# Altium PCB WS7.820.291.V04.PcbDoc (part 2 of 3)
Units mil, origin at the board's own origin, x right, y up, seen from the top; angles counter-clockwise.
Board outline 9222.63 x 1665.56 mil, 4 copper layers (Top Layer, S2, S3, Bottom Layer); 240 components, 148 nets, 713 pads, 1711 vias.
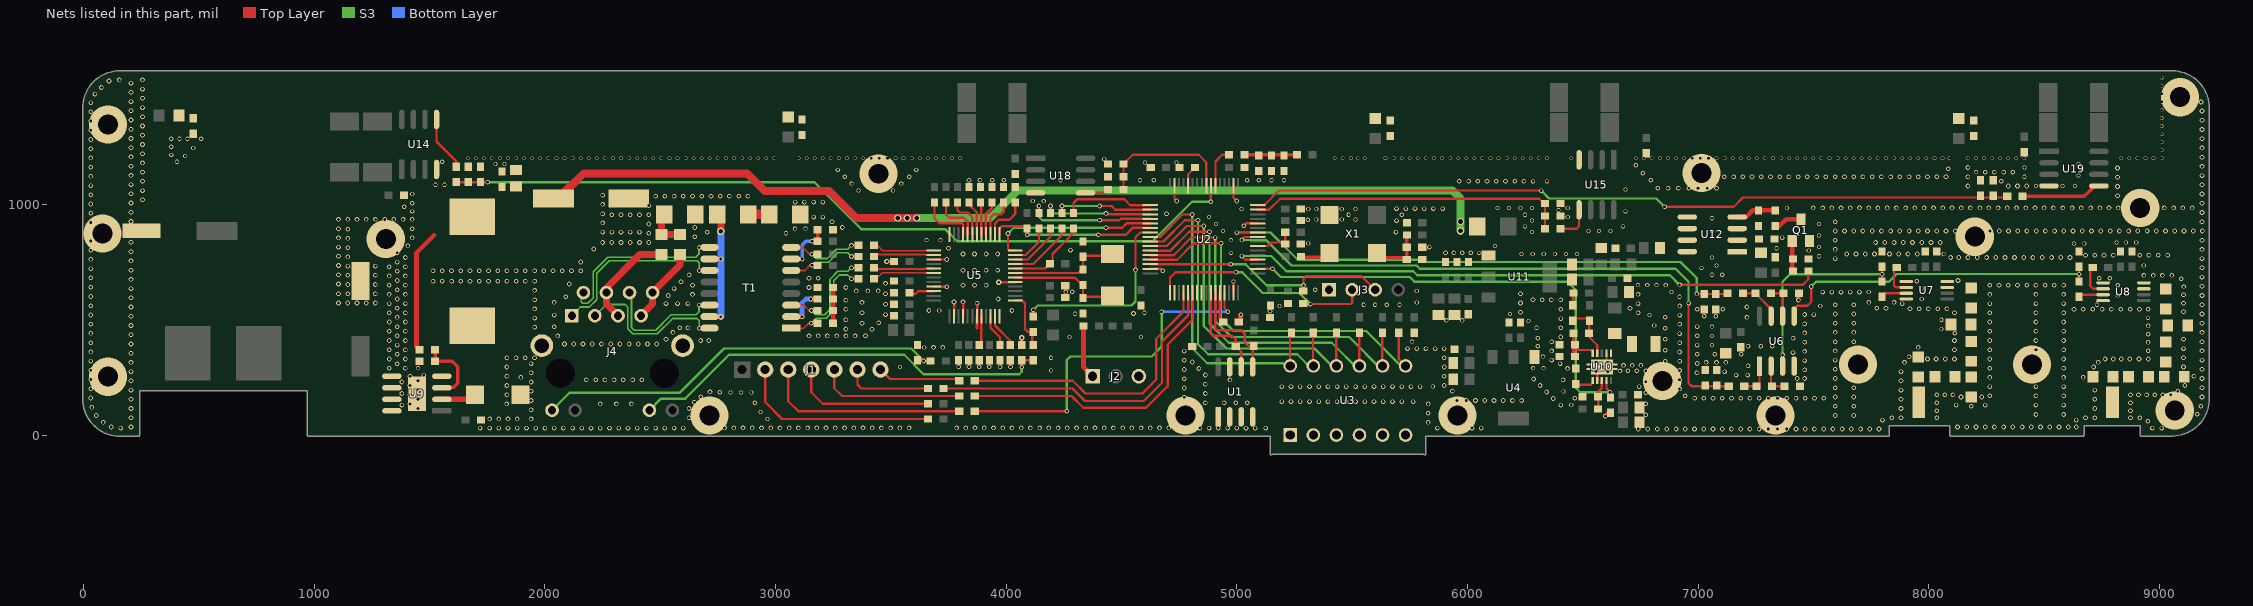
[diagram p4: the nets of this part, all layers, seen from the top]

## Via types
v1: diameter 20, hole 12, Top Layer to Bottom Layer, tented both sides, 1181 vias
v2: diameter 18, hole 12, Top Layer to Bottom Layer, tented both sides, 177 vias
v3: diameter 26, hole 16, Top Layer to Bottom Layer, tented both sides, 160 vias
v4: diameter 15.75, hole 12, Top Layer to Bottom Layer, tented both sides, 151 vias
v5: diameter 165.35, hole 86.61, Top Layer to Bottom Layer, 17 vias
v6: diameter 32, hole 20, Top Layer to Bottom Layer, tented both sides, 14 vias
v7: diameter 23.62, hole 11.81, Top Layer to Bottom Layer, tented both sides, 8 vias
v8: diameter 30, hole 20, Top Layer to Bottom Layer, tented both sides, 1 vias
v9: diameter 20, hole 11.81, Top Layer to Bottom Layer, tented both sides, 1 vias
v10: diameter 20, hole 12, Top Layer to Bottom Layer, 1 vias

## Nets (pads, with @x,y where several pads share a name; then routed paths per layer and width w, separated by ;. In a path a pad name is that pad's centre, name@x,y a point inside that pad or via, vN(x,y) a via of type N, cw(c..) or ccw(c..) an arc to the next point about the centre after c; other vN are vias at no path point) (continued)
GND: C1.1 C2.1 C3.1 C4.1 C5.1 C6.1 C7.1 C8.1 C9.1 C10.1 C11.2 C12.2 C13.1 C14.1 C15.1 C16.1 C17.1 C18.1 C19.1 C20.1 C21.1 C22.2 C23.2 C24.1 C25.1 C26.1 C27.1 C28.1 C29.1 C30.1 C31.1 C32.1 C33.1 C34.1 C35.1 C36.1 C37.1 C38.1 C39.1 C40.1 C41.1 C42.1 C43.2 C44.2 C45.2 C46.2 C47.2 C51.2 C52.1 C53.1 C54.1 C55.2 C56.2 C60.1 C61.1 C62.1 C63.1 C64.2 C65.1 C66.1 C67.1 C68.1 C72.2 C73.1 C74.2 C75.2 C76.1 C77.1 C78.1 C79.1 C80.1 C81.1 C82.1 C84.2 C85.2 C87.2 C88.1 C89.1 C90.1 C91.1 C92.1 C93.1 C94.1 C95.1 C96.1 C97.1 C98.1 C99.1 C100.1 C101.1 C103.1 C104.1 C105.1 C106.1 D1.1 J2.3 J3.1 J4.13 J4.14 L11.1 Q1.2 R4.2 R8.1 R10.1 R15.1 R52.1 R55.1 R56.1 R57.1 R58.1 R59.1 R60.1 R64.1 R65.1 R66.1 R67.1 R72.1 R73.1 R74.1 R75.1 R82.2 R86.1 R123.1 U1.1 U1.2 U1.3 U1.4 U1.7 U2.12 U2.18 U2.31 U2.47 U2.63 U3.1 U3.3 U3.5 U3.7 U3.9 U3.11 U4.1 U5.3 U5.9 U5.14 U5.16 U5.19 U5.29 U5.48 U6.4 U7.4 U7.5 U7.8 U8.4 U8.5 U8.8 U9.4 U9.5 U9.6 U9.7 U9.8 U9.9 U10.2 U10.7 U10.11 U11.1 U14.4 U15.4 U18.4 U19.4 X1.2 | length 1018.8
  Top Layer w10: v7(3482.85,752.46) C31.1@3513.39,752.46 ; U5.9@3685.69,643.25 v1(3742.18,643.25) ; U5.3@3685.69,761.36 v1(3742,761.36) ; v9(3774,577) 3774.27,576.73 U5.14@3774.27,515.3 ; v1(3812.85,577.46) 3813.64,576.68 U5.16@3813.64,515.3 ; U5.19@3872.69,515.3 3872.69,462.31 3874,463.61 v1(3874,571.79) ; v7(3967.85,662.46) 3968.32,662.94 U5.29@4040.02,662.94 ; C39.1@4067.85,390.93 v7(4067.85,422.46) ; U2.47@4625.55,721.04 4670.32,721.04 v2(4678.7,712.66) ; U2.31@4730.08,1081.2 4730.08,1024.92 v1(4740,1015) ; U2.63@4985.71,616.52 4985.71,662.71 v2@4986,663 ; v2@4986,662 v2(4986,666) ; U2.18@4985.98,1081.2 4985.98,1029.02 v1(5000,1015) ; v1(5030,908) 5039.89,917.89 U2.12@5090.23,917.89 ; U10.2@6563.31,236.94 U10.11@6563.31,272.57 ; v10(6598.35,81.39) R4.2@6604.86,81.39 ; U10.11@6602.68,319.43 U10.7@6602.68,355.06 ; v1(7435,585.37) v1@7435.31,587.69
  Top Layer w20: R10.1@5008.46,490 5016,497.54 5016,511.65 5017,512.65 v1(5017,521.65) ; v10(6598.35,81.39) 6613.49,96.54 R4.2@6620,96.54 ; v1@7435.31,587.69 R75.1@7435.31,614.81
  other v1: 6740.29,26 6781.76,26 6823.23,26 6864.7,26 6904.7,26 6944.7,26 6984.7,26 7024.7,26 7064.7,26 7104.7,26 7144.7,26 7184.7,26 7224.7,26 7264.7,26 7304.7,26 7344.7,26 7384.7,26 7424.7,26 7464.7,26 7504.7,26 7544.7,26 7584.7,26 7624.7,26 7664.7,26 7704.7,26 7744.7,26 7784.7,26 160,30 1719,30 1760,30 1800,30 1840,30 1880,30 1920,30 1960,30 2000,30 2040,30 2080,30 2120,30 2160,30 2200,30 2240,30 2280,30 2320,30 2360,30 2400,30 2440,30 2480,30 2520,30 2560,30 2600,30 4840,30 4880,30 4920,30 4960,30 5000,30 5040,30 5080,30 5125,30 5870,30 6020,30 6060,30 8970,30 9010,30 2779,31 2819,31 2859,31 2899,31 2939,31 2979,31 3019,31 3059,31 3099,31 3139,31 3179,31 3219,31 3259,31 3299,31 3339,31 3379,31 3419,31 3459,31 3499,31 3539,31 3579,31 3785,31 3825,31 3865,31 3905,31 3945,31 3985,31 4025,31 4065,31 4105,31 4145,31 4185,31 4225,31 4265,31 4305,31 4345,31 4385,31 4425,31 4465,31 4505,31 4545,31 4585,31 4625,31 4665,31 4705,31 120,35 205,35 8125,35 8165,35 8205,35 8245,35 8285,35 8325,35 8365,35 8405,35 8445,35 8485,35 8525,35 8565,35 8605,35 8640,35 85,55 5830,55 8950,60 7800,65 8640,65 1760,70 1800,70 1840,70 1880,70 1940,70 205,75 2625,75 7840,75 7880,75 8035,75 8680,75 8720,75 8875,75 8915,75 55,85 7595,85 7675,85 6773,87.91 8465,89 8585,89 9165,90 5830,95 8035,105 8875,105 1940,110 205,115 1450,115 2625,115 7880,115 8720,115 35,120 7595,125 7675,125 8185,125 9180,125 1380,130 6405,130 8120,130 8245,130 8465,130 8585,130 1415,135 1833.92,135 2240,135 2310,135 2375,135 5830,135 6773,135.52 4863.85,140.15 4945,140 4995,140 5045,140 8035,140 8875,140 2648,142 5195,145 5235,145 5275,145 5315,145 5355,145 5395,145 5435,145 5475,145 5515,145 5555,145 5595,145 5635,145 5675,145 5715,145 5765,145 1940,150 5955,150 5995,150 6035,150 6075,150 6115,150 6155,150 6195,150 6235,150 205,155 1450,155 7880,155 8720,155 6371.72,158.28 6465,160 6985,160 7025,160 7065,160 7105,160 7145,160 7185,160 7225,160 7265,160 7305,160 7345,160 7385,160 7425,160 7465,160 7505,160 7545,160 30.58,160.66 4772,164 7595,165 7675,165 8140,165 8230,165 9185,165 2675.59,166.01 6945,170 8265,170 8465,170 8585,170 1415,175 1835,175 8035,175 8070,175 8105,175 8875,175 8910,175 8945,175 8980,175 9015,175 9050,175 1380,180 4863.85,180.15 6773,183.14 2758,186 2716,187 6343.43,186.57 1940,190 5935,190 9080,190 205,195 1450,195 7880,195 8720,195 6920,200 30.58,200.66 4772,204 7595,205 7675,205 9185,205 5195,210 5235,210 5275,210 5315,210 5355,210 5395,210 5435,210 5475,210 5515,210 5555,210 5595,210 5635,210 5675,210 5715,210 5755,210 5795,210 6745,210 8265,210 8465,210 8585,210 1415,215 1835,215 5900,215 6315.15,214.85 9110,215 4863.85,220.15 1380,230 1940,230 6773,230.76 205,235 1450,235 7880,235 4970,239 2180,240 2220,240 2260,240 2300,240 2340,240 2380,240 2420,240 6415,240 6920,240 30.58,240.66 6286.86,243.14 4772,244 7430,245 7461.85,245 7595,245 9185,245 1895,250 8265,250 8585,250 8670,250 1415,255 1835,255 5900,255 9150,255 1475,260 4863.85,260.15 7165,260 7215,260 1940,270 6995,270 205,275 7115,275 7880,275 6558,276 6608,276 6662,278 6695,279 6734,279 6773,279 6920,280 30.58,280.66 7461.85,282.75 4772,284 7595,285 9185,285 4835.57,288.43 6434,289 1325,290 1395,290 8265,290 8585,290 1835,295 5900,295 8715,295 9105,295 3793.69,295.93 3838.69,295.93 3883.69,295.93 3927,295.93 3973.69,295.93 4018.69,295.93 6583,296 7217,300.18 6677,302 6714.5,302 6752,302 1359.66,309.66 1940,310 6402,310 6997,310.18 205,315 7035,315 7080,315 7120,315 7895,315 8735,315 6558,316 6608,316 4807.28,316.72 6858,320.29 6920,320 30.58,320.66 7461.85,322.75 4772,324 6365,325 7595,325 9185,325 1325,330 1395,330 7995,330 8032,330 8072,330 8112,330 8265,330 8585,330 8765,330 8800,330 8835,330 8872,330 8912,330 8952,330 1835,335 1875,335 1915,335 1955,335 5900,335 9105,335 7915,340 1360.1,350.1 6997,350.18 7072,350.18 7187,350.18 205,355 7411.56,357.46 6920,360 30.58,360.66 7461.85,362.75 4772,364 6365,365 7595,365 9185,365 8952,365.83 6858,367.91 1325,370 1395,370 8112,370 8265,370 8465,370 8585,370 5740,375 5780,375 5820,375 5860,375 5900,375 9105,375 3685,380 3725,380 7955,380 7217,385.18 7272,385.18 7322,385.18 1360.1,390.1 6997,390.18 205,395 2085,395 2125,395 2165,395 2205,395 2245,395 2285,395 2325,395 2365,395 2405,395 2445,395 2485,395 6920,400 30.58,400.66 8952,401.67 7461.85,402.75 6365,405 7595,405 7675,405 9185,405 1325,410 1395,410 2675,410 2710,410 8112,410 8265,410 8465,410 8585,410 2525,415 9105,415 6858,415.52 7412,420.18 6405,425 1360.1,430.1 2055,430 3145,430 3185,430 3225,430 3265,430 3305,430 3345,430 3390.15,430.15 6997,430.18 205,435 8952,437.5 6920,440 30.58,440.66 8113,441 7461.85,442.75 2555,445 7595,445 7675,445 9185,445 1325,450 1395,450 8265,450 8465,450 8585,450 3418.43,458.43 3305,460 6858,463.14 2585,465 2620,465 6405,465 1955.21,467.13 1360.1,470.1 2040,470 6997,470.18 8952,473.33 205,475 6920,480 30.58,480.66 7461.85,482.75 3375,485 7595,485 7675,485 9185,485 3446.72,486.72 1325,490 1395,490 8265,490 8465,490 8585,490 5909,497 5977.35,497 3305,500 6405,505 1955.21,507.13 1360.1,510.1 7212,510.18 6858,510.76 205,515 7027,515.18 7077,515.18 2040,520 6920,520 30.58,520.66 7502,522.23 3476.85,522.46 7461.85,522.75 7595,525 7675,525 9185,525 4552,527 1325,530 1395,530 3375,530 6740,530 8112,530 8265,530 8465,530 8585,530 6230,532.49 9105,535 5144,537 3665,540 4025,540 3305,545 6405,545 6997,545.18 7107,545.18 8630,545 8670.62,545 8711.25,545 8751.88,545 8792.5,545 8833.12,545 8873.75,545 8914.38,545 8952,545 1955.21,547.13 7919,548 7959,548 7999,548 8039,548 8079,548 1360.1,550.1 6705,550 7775,550 7815,550 205,555 7212,555.18 6920,560 30.58,560.66 7595,565 7675,565 9185,565 3476.85,567.46 1325,570 1395,570 2525,570 2575,570 2620,570 6740,570 7885,570 8265,570 8465,570 8585,570 9105,571.5 1105,572.59 1145,572.59 1185,572.59 1225,572.59 1265,572.59 6230,572.49 2040,575 3375,575 7740,575 7850,575 3305,585 1955.21,587.13 6284.14,587 6324.14,587 6364.14,587 6404.14,587 1360.1,590.1 3965,590 205,595 2090,600 30.58,600.66 2535,605 9185,605 9105,608 1325,610 1395,610 2640,610 6740,610 8265,610 8465,610 8585,610 1105,612.59 1145,612.59 1265,612.59 3476.85,612.46 6230,612.49 7540,620 7580,620 7620,620 7660,620 7700,620 4257.85,620.81 4287,621 3350,625 3400,625 3445,625 1955.21,627.13 1360.1,630.1 205,635 2560,635 3145,640 3305,640 30.58,640.66 9185,645 1325,650 1395,650 2640,650 3812.85,649.93 3862.85,649.93 3912.85,649.93 8265,650 8305,650 8345,650 8385,650 8425,650 8465,650 8505,650 8545,650 8585,650 8820,650 1145,652.59 1265,652.59 1105,655 2105,655 3476.85,657.46 2590,665 1515.21,667.13 1555.21,667.13 1595.21,667.13 1635.21,667.13 1675.21,667.13 1715.21,667.13 1755.21,667.13 1795.21,667.13 1835.21,667.13 1875.21,667.13 1915.21,667.13 1955.21,667.13 7948,667 1360.1,670.1 8127,670 205,675 3145,680 8740,680 8785,680 30.58,681.66 9185,685 1325,690 1395,690 8933.42,692.13 8973.42,692.13 9013.42,692.13 9054.42,692.13 1145,692.59 1265,692.59 1105,695 2625,695 1360.1,710.1 1515.15,712.24 1555.15,712.24 1595.15,712.24 1635.15,712.24 1675.15,712.24 1715.15,712.24 1755.15,712.24 1795.15,712.24 1835.15,712.24 1875.15,712.24 1915.15,712.24 1955.15,712.24 1995.15,712.24 2035.15,712.24 2075.15,712.24 2115.15,712.24 2155.15,712.24 205,715 3812.85,714.93 3862.85,714.93 3912.85,714.93 3962.85,714.93 30.58,721.66 9185,725 1325,730 1395,730 1145,732.59 1265,732.59 1105,735 1360.1,750.1 2155.15,750.15 205,755 30.58,761.66 7595,765 9185,765 1395,770 8095,770 8130,770 8170,770 8211,770 8251,770 8291,770 8331,770 8372,770 8412,770 8452,770 8492,770 8533,770 8573,770 8613,770 1145,772.59 1105,775 8680,780 8720,780 8760,780 8801,780 8915,780 8955,780 8995,780 9036,780 3812.85,784.93 3862.85,784.93 3912.85,784.93 3962.85,784.93 7645,785 7685,785 7725,785 7765,785 7830,785 7870,785 7910,785 7950,785 1360.1,790.1 5905,790 5941.5,790 5978,790 6014.5,790 205,795 30.58,801.66 4279,802 7595,805 9185,805 2211.72,806.72 3750,810 1145,812.59 1105,815 5835,815 1405,820 2250,835 2290,835 2330,835 2370,835 2410,835 2450,835 7770,835 7810,835 7850,835 7890,835 7930,835 7970,835 8010,835 8050,835 205,836 30.58,841.66 7595,845 9185,845 1145,852.59 1105,855 1425,855 7365,856.18 2650,860 2450,875 2704,879 2250,880 2290,880 2330,880 2370,880 2410,880 5690,880 7595,885 7635,885 7675,885 7715,885 7755,885 7795,885 7835,885 7875,885 7915,885 7955,885 7995,885 8035,885 8075,885 8115,885 8266,885 8306,885 8346,885 8386,885 8426,885 8466,885 8506,885 8546,885 8586,885 8626,885 8666,885 8706,885 8746,885 8787,885 8827,885 8867,885 8907,885 8947,885 8987,885 9027,885 9067,885 9107,885 9147,885 9187,885 1145,892.59 1105,895 1425,895 2650,900 3290,900 2450,915 2250,920 30.58,921.66 3245,925 7595,925 9185,925 205,926 5692.49,930 5308,934 1105,935 1145,935 1185,935 1225,935 1265,935 1305,935 1345,935 1385,935 1425,935 3165,945 3205,945 2290,955 2330,955 2370,955 2410,955 2450,955 5715,955 2250,960 4695,960 30.58,961.66 9185,965 205,966 5692.49,982.06 5732.49,982.06 5772.49,982.06 5812.49,982.06 5852.49,982.06 5892.49,982.06 7500,985 7540,985 7580,985 7620,985 7660,985 7700,985 7740,985 7780,985 7820,985 7860,985 7900,985 7940,985 7980,985 8021,985 8061,985 8101,985 8141,985 8181,985 8221,985 8261,985 8301,985 8341,985 8381,985 8421,985 8461,985 8501,985 8541,985 8582,985 8622,985 8662,985 8702,985 8742,985 8782,985 8822,985 9022,985 9062,985 9102,985 9143,985 2450,995 2250,1000 30.58,1001.66 9185,1005 205,1006 3085,1010 3125,1010 3165,1010 3205,1010 255,1020 2480,1035 2520,1035 2560,1035 2600,1035 2640,1035 2680,1035 2720,1035 2760,1035 2800,1035 2840,1035 2880,1035 8818.94,1037.83 2250,1040 30.58,1041.66 9185,1045 205,1046 255,1060 6825,1070 6870,1070 6915,1070 6960,1070 7000,1070 7040,1070 7080,1070 8818.94,1077.83 8170,1080 8345,1080 8385,1080 8425,1080 30.58,1081.66 9185,1085 205,1086 255,1100 5965,1100 6005,1100 6045,1100 6085,1100 6125,1100 6165,1100 6205,1100 6245,1100 8315,1100 3839,1105 3886,1105 3940,1105 3990,1105 6795,1105 8818.94,1117.83 7114,1120 7154,1120 7194,1120 7234,1120 7274,1120 7314,1120 7354,1120 7394,1120 7434,1120 7474,1120 7514,1120 7554,1120 7595,1120 7635,1120 7675,1120 7715,1120 7755,1120 7795,1120 7835,1120 7875,1120 7915,1120 7955,1120 7995,1120 8035,1120 8075,1120 8170,1120 30.58,1121.66 9185,1125 205,1126 6760,1135 255,1140 8245,1140 8285,1140 8325,1140 8365,1140 8818.94,1157.83 8170,1160 30.58,1161.66 9185,1165 205,1166 255,1180 4425,1196.65 30.58,1201.66 9185,1205 205,1206 255,1220 30.58,1241.66 9185,1245 205,1246 255,1260 30.58,1281.66 9185,1285 205,1286 255,1300 30.58,1321.66 9185,1325 205,1326 255,1340 30.58,1361.66 9185,1365 205,1366 255,1380 30.58,1401.66 9185,1405 205,1406 255,1420 30.58,1441.66 9181,1444 205,1446 255,1460 48.54,1478.54 205,1486 255,1500 76.82,1506.82 205,1526 110,1535 155,1540 255,1540
  other v2: 2965,70 2935,100 6450,130 2910,140 2805,185 2850,185 2895,185 6416,189 5850,210 4195,280 1450,290 6285,290 6330,290 3540,295 4195,335 6327.91,339.86 3645,380 6305,385 7060,390 5760,405 6305,420 4275,425 4585,425 7060,430 8055,460 6300,465 7060,470 6810,475 6265,495 8055,500 8951,508.17 6790,520 6185,525 4299,526 4600,530 3710,540 5185,560 7530,560 5550,565 5600,565 5650,565 5705,565 8730,565 5780,575 7970,590 6920,600 8820,605 6885,620 7740,620 5780,625 5340,630 7970,635 9106,643.5 6740,650 6780,650 6820,650 6860,650 9095,678 3185,680 7060,695 7105,695 7015,725 7080,735 8932.42,735 7060,770 7525,775 6235,785 6283,785 6331,785 6379,785 6427,785 6475,785 8065,785 4975,790 6050,790 7480,800 7340,810 7525,815 6120,820 5310,830 8630,830 8675,830 8815,835 8855,835 8900,835 3655,845 3715,845 4975,845 7525,865 3045,875 6280,880 4940,885 6525,885 6570,885 6620,885 7060,885 3085,895 3130,895 6250,905 6675,905 4910,915 7525,915 6280,930 5345,935 5455,935 5515,935 7060,940 4880,945 6435,945 5485,955 6250,955 1425,970 6685,970 6395,975 5020,980 5310,980 5345,980 5455,980 5515,980 6130,985 6180,985 6230,985 6280,985 6435,985 7385,985 1390,990 1425,1005 4163.17,1014.17 4115,1015 1425,1045 3360,1060 3510,1060 6685,1065 8465,1080 8580,1080 8635,1080 1525,1085 1565,1085 3330,1090 3545,1090 6285,1100 6345,1100 4235,1105 4580,1105 4640,1105 5045,1105 5095,1105 5150,1105 5205,1105 3300,1120 3580,1120 8415,1120 8650,1125 8205,1140 3270,1150 3610,1150 8085,1155 8415,1160 6730,1170 1785,1175 1825,1175 8650,1175 4602,1181.65 4739.04,1181.65 405,1185 1555,1185 440,1210 380,1215 475,1245 380,1250 380,1285 415,1285 450,1285 510,1285
  other v4: 1665,1200 1700,1200 1735,1200 1770,1200 1805,1200 1840,1200 1875,1200 1910,1200 1945,1200 1980,1200 2015,1200 2050,1200 2085,1200 2120,1200 2155,1200 2190,1200 2225,1200 2260,1200 2295,1200 2330,1200 2365,1200 2400,1200 2435,1200 2470,1200 2505,1200 2540,1200 2575,1200 2610,1200 2645,1200 2680,1200 2715,1200 2750,1200 2785,1200 2820,1200 2855,1200 2890,1200 2925,1200 2960,1200 2995,1200 3100,1200 3135,1200 3170,1200 3205,1200 3240,1200 3275,1200 3310,1200 3345,1200 3380,1200 3415,1200 3450,1200 3485,1200 3520,1200 3555,1200 3590,1200 3625,1200 3660,1200 3695,1200 3730,1200 3765,1200 3800,1200 5425,1200 5460,1200 5495,1200 5525,1200 5555,1200 5645,1200 5680,1200 5715,1200 5750,1200 5785,1200 5820,1200 5855,1200 5890,1200 5925,1200 5960,1200 5995,1200 6030,1200 6065,1200 6100,1200 6135,1200 6170,1200 6205,1200 6240,1200 6275,1200 6310,1200 6345,1200 6450,1200 6730,1200 6765,1200 6800,1200 6835,1200 6870,1200 6905,1200 6940,1200 6975,1200 7010,1200 7045,1200 7080,1200 7115,1200 7150,1200 7185,1200 7220,1200 7255,1200 7290,1200 7325,1200 7360,1200 7395,1200 7430,1200 7465,1200 7500,1200 7535,1200 7570,1200 7605,1200 7640,1200 7675,1200 7710,1200 7745,1200 7780,1200 7815,1200 7850,1200 7885,1200 7920,1200 7955,1200 7990,1200 8025,1200 8060,1200 8090,1200 8170,1200 8205,1200 8240,1200 8275,1200 8310,1200 8345,1200 8380,1200 8413.87,1200 8835,1200 8870,1200 8905,1200 8940,1200 8975,1200 9010,1200 9010,1235 9010,1270 9010,1305 9010,1340 9010,1375 9010,1410 9010,1445 9010,1480 9010,1515 9010,1550
  other v5: 4777,84 5957,84 2714,85 7336,85 9067,105.94 6845,235 105,253 7694,306 8448,306 1310,850 8200,860 81,874 8917.17,984.41 3447,1133 7015,1136.94 105,1346 9090.01,1465.01
I_SENSOR1: C92.2 C93.2 R93.2 U2.23 | length 3519.3
  Top Layer w10: R93.2@1615,1096.54 C92.2@1720.65,1096.54 v1(1751.54,1096.54) ; v1(4887.56,1012) U2.23@4887.56,1081.2
  S3 w10: v1(1751.54,1096.54) 3060,1096.54 3168.46,1096.54 3372,893 3735,893 3788,840 4634,840 4806,1012 v1(4887.56,1012)
I_SENSOR2: C103.2 C104.2 R100.2 U2.24 | length 600.5
  Top Layer w10: R100.2@4508.46,1065 C104.2@4508.46,1175 4548.46,1215 4835,1215 4867.87,1182.13 U2.24@4867.87,1081.2
I_SENSOR3: C94.2 C95.2 R94.2 U2.15 | length 1385.2
  Top Layer w10: U2.15@5090.23,976.95 5139.95,976.95 5188,1025 6311.54,1025 C95.2@6336.54,1000 ; R94.2@6336.54,895 C95.2@6336.54,1000 ; C95.2@6336.54,1003.65 C95.2@6336.54,1000
I_SENSOR4: C105.2 C106.2 R101.2 U2.16 | length 3324.2
  Top Layer w10: U2.16@5090.23,996.63 5118.63,996.63 5182,1060 v1(6320,1060) ; v1(6855,990) 7155,990 7195,1030 8335.54,1030 R101.2@8340.54,1035
  S3 w10: v1(6320,1060) 6354,1026 6819,1026 v1(6855,990)
IO1: R132.1 U2.45 U3.12 | length 1730.8
  Top Layer w10: U2.45@4625.55,760.41 4742.04,760.41 4812.85,831.23 v1(4931.85,831.23) ; R132.1@5701.85,443.76 5701.85,329.97 U3.12@5731.85,299.97 U3.12@5731.85,280.28
  S3 w10: v1(4931.85,831.23) 4931.85,505.15 4986,451 5561.13,451 U3.12@5731.85,280.28
IO2: R127.1 U2.44 U3.10 | length 1639.5
  Top Layer w10: U2.44@4625.55,780.1 4726.72,780.1 4802.85,856.23 v1(4906.85,856.23) ; U3.10@5630.7,281.99 R127.1@5630.7,433.53
  S3 w10: v1(4906.85,856.23) 4906.85,495.12 4976.97,425 5487.13,425 U3.10@5631.85,280.28
IO3: R119.1 U2.43 U3.8 | length 1573.7
  Top Layer w10: U2.43@4625.55,799.78 4712.41,799.78 4793.85,881.23 v1(4881.85,881.23) ; U3.8@5530.7,281.99 R119.1@5530.7,433.53
  S3 w10: v1(4881.85,881.23) 4881.85,483.15 4965,400 5412.13,400 U3.8@5531.85,280.28
IO4: R131.1 U2.42 U3.6 | length 1506.7
  Top Layer w10: U2.42@4625.55,819.47 4696.09,819.47 4782.85,906.23 v1(4856.85,906.23) ; U3.6@5430.7,281.99 R131.1@5430.7,433.53
  S3 w10: v1(4856.85,906.23) 4856.85,473.15 4955,375 5337.13,375 U3.6@5431.85,280.28
IO5: R126.1 U2.41 U3.4 | length 1480.2
  Top Layer w10: U2.41@4625.55,839.15 4681.78,839.15 4773.85,931.23 v1(4831.85,931.23) ; U3.4@5330.7,281.99 R126.1@5330.7,433.53
  S3 w10: v1(4831.85,931.23) 4831.85,394.15 4876,350 5262.13,350 U3.4@5331.85,280.28
IO6: R118.1 U2.40 U3.2 | length 1418
  Top Layer w10: U2.40@4625.55,858.84 4666.46,858.84 4763.85,956.23 v1(4806.85,956.23) ; U3.2@5230.7,281.99 R118.1@5230.7,433.53
  S3 w10: v1(4806.85,956.23) 4806.85,376.15 4872,311 5201.13,311 U3.2@5231.85,280.28
JTCK: J3.2 R8.2 U2.49 | length 1104.4
  Top Layer w10: U2.49@4710.12,616.52 4710.12,682.12 4734,706 v1(4997,706) ; R8.2@5288.46,570 5290.46,568 v1(5319,568) 5392,568 ; 5484,568 5392,568 ; J3.2@5500,630 5500,574 5494,568 5392,568
  S3 w10: v1(4997,706) 5023,706 5113,616 5271,616 v1(5319,568)
JTDI: U2.50
JTDO: U2.55
JTMS: J3.3 R6.1 U2.46 | length 1099.1
  Top Layer w10: U2.46@4625.55,740.73 v1(4974.27,740.73) ; R6.1@5288.46,625 5289,625.54 v1(5289,649) 5289,677 5301,689 5541,689 J3.3@5600,630
  S3 w10: v1(4974.27,740.73) 5038.27,740.73 5130,649 v1(5289,649) v1@5289,654
LINKLED: R50.2 R77.2 U5.25 | length 264.4
  Top Layer w10: U5.25@4040.02,584.2 4068.12,584.2 4081.35,570.96 4081.35,459.65 4094.46,446.54 R77.2@4117.85,446.54 ; R77.2@4112.85,444 4112.85,390.93 R50.2@4120.85,398.93
M_SCL: R2.1 U1.6 U2.58 | length 428.6
  Top Layer w10: U2.58@4887.28,616.52 4887.28,438.72 4896,430 4979,430 4995.31,413.69 R2.1@4995.31,383.65 ; R2.1@4997.28,383.65 4997.28,382.72 5019,361 U1.6@5019,290.27
M_SDA: R3.1 U1.5 U2.59 | length 467
  Top Layer w10: U2.59@4906.97,616.52 4906.97,462.03 4915,454 4991,454 5020,454 5034,440 5034,402 5049.46,386.54 R3.1@5070,386.54 ; R3.1@5067.42,384.12 R3.1@5069,382.54 ; U1.5@5069,290.27 R3.1@5069,382.54 ; R3.1@5070,381.54 R3.1@5069,382.54
NetC10_2: C10.2 C11.1 FB2.1 X1.4 | length 244.6
  Top Layer w15: X1.4@5607.36,789.32 5628.46,768.23 C10.2@5736.85,768.23 ; C10.2@5736.85,761.23 C11.1@5736.85,814.05 5736.85,866.87 FB2.1@5737.39,867.41
NetC33_2: C33.2 R33.1 R35.1 R37.1 | length 155.2
  Top Layer w20: C33.2@3248.46,640 3249.46,639 R35.1@3249.46,540.23 R37.1@3249.46,485.23
NetC35_2: C35.2 R47.2 U5.30 X2.2 | length 522.3
  Top Layer w10: U5.30@4040.02,682.62 4297.29,682.62 4332.85,647.06 4332.85,599.69 4470.77,599.69 4474,602.93 X2.2@4498.87,602.93
NetC36_2: C36.2 J4.9 R45.1 | length 1802
  Top Layer w10: C36.2@3615,324 3617.88,321.12 v1(3642,321.12) R45.1@3671.54,321.12
  S3 w10: J4.9@2030.83,107.65 2107.18,184 2586,184 2777,375 3588.12,375 v1(3642,321.12)
NetC37_2: C37.2 R47.1 U5.31 X2.1 | length 487.2
  Top Layer w10: U5.31@4040.02,702.31 4312.23,702.31 4332.85,722.93 4332.85,777.76 4453.6,777.76 X2.1@4460.85,785.01
NetC38_2: C38.2 U5.20 | length 128.3
  Top Layer w10: C38.2@3882.85,390.93 3892.38,400.46 U5.20@3892.38,515.3
NetC39_2: C39.2 J4.11 R50.1 | length 1848.1
  Top Layer w10: v1(4068,294) 4067.85,294.15 C39.2@4067.85,324 R50.1@4112.85,324
  S3 w10: J4.11@2452.87,107.65 2503.23,158 2608,158 2798,348 3558,348 3642,264 4057,264 4068,275 v1(4068,294)
NetC40_2: C40.2 U5.22 | length 141.4
  Top Layer w10: U5.22@3931.75,515.3 3931.75,465.57 3972.85,424.46 C40.2@3972.85,390.93
NetC41_2: C41.2 R46.1 R48.1 | length 173.2
  Top Layer w30: C41.2@2518.07,957 2506,944.93 R46.1@2506,868.78 R48.1@2586,868.78
NetC42_2: C42.2 R51.1 | length 91.1
  Top Layer w40: R51.1@2881.78,957 C42.2@2972.92,957
NetC48_1: C48.1 U7.6 | length 146.6
  Top Layer w10: C48.1@7861.54,726.65 7850,715.12 7850,648 7857.56,640.44 U7.6@7902.97,640.44 ; C48.1@7866.54,721.65 C48.1@7871.54,726.65
NetC49_1: C49.1 R63.2 R65.2
NetC49_2: C49.2 C50.1 R66.2
NetC50_2: C50.2 U7.3
NetC52_2: C52.2 R61.2 U6.3 | length 1008.6
  Top Layer w10: U6.3@7366.56,289.2 v1(7366.56,347.62) ; R61.2@7798,666.46 v1(7798,697) C52.2@7798,729.54
  S3 w10: v1(7366.56,347.62) 7366.56,665 7398.56,697 7545,697 ; 7420,697 7545,697 ; v1(7798,697) 7545,697
NetC57_1: C57.1 U8.6 | length 145.1
  Top Layer w10: C57.1@8711.54,726.65 8701,716.12 8701,700.46 8701,693 8701,646 8712.82,634.18 U8.6@8756.15,634.18
NetC58_1: C58.1 R71.2 R73.2
NetC58_2: C58.2 C59.1 R74.2
NetC59_2: C59.2 U8.3
NetC61_2: C61.2 R69.2 U6.5 | length 1514.8
  Top Layer w10: U6.5@7416.56,505.73 7416.56,546.56 7430,560 7472.82,560 7491,578.18 v1(7491,644.18) ; R69.2@8652,666.46 v1(8652,698) C61.2@8652,729.54
  S3 w10: 8034.39,698 8099,698 ; 8105,698 8099,698 ; v1(8652,698) 8099,698 ; v1@7492,645.18 7491,646.18 v1(7491,644.18) v1@7492,645.18 ; v1@7492,645.18 7511.82,665 7828,665 7861,698 8099,698
NetC68_2: C68.2 C72.1 C73.2 FB11.1 L4.2 R80.2 | length 4878.2
  Top Layer w20: R80.2@1456.54,370 1443,383.54 1443,790 1519,866
  Top Layer w35: 2104.23,1070.77 2168.46,1135 2876.54,1135 2952.54,1059 3232,1059 3350,941 v6(3612,941)
  Top Layer w40: C72.1@2031.61,1035 2068.46,1035 2104.23,1070.77
  S3 w35: v6(3530,941) v6(3612,941) 3931,941 4050,1060 5935,1060 5970,1025 v6(5970,885.89)
  other v6: 5970,925.89 3571,941
NetC75_1: C75.1 L5.2 R85.2 U12.1 U12.2 U12.3
NetC81_2: C81.2 C82.2 R83.2 R84.2 R86.2 | length 228.1
  Top Layer w15: R84.2@5033.46,1215 5150,1215 R83.2@5261.54,1215
NetC84_1: C84.1 C85.1 R22.2 U10.10 | length 194.8
  Top Layer w10: C84.1@6456.46,341 6459.54,344.07 R22.2@6459.54,441 ; 6459.54,369 6536,369 6543.63,361.37 U10.10@6543.63,355.06
NetC86_1: C86.1 R22.1 R25.2 U10.9 | length 224.8
  Top Layer w10: C86.1@6456.65,505.54 R25.2@6529.35,505.54 ; R25.2@6528,492.54 6528,425 6563.31,389.69 U10.9@6563.31,355.06
NetC86_2: C86.2 R27.2 | length 50.7
  Top Layer w10: C86.2@6456.65,572.46 R27.2@6456.65,623.12
NetC90_2: C90.2 R23.2 U10.3 | length 132.7
  Top Layer w10: R23.2@6571.46,113 6566.66,117.81 6566.66,187.65 6583,204 U10.3@6583,236.94
NetC97_2: C97.2 U10.1 | length 94.4
  Top Layer w10: C97.2@6466.46,226 6474.46,218 6535,218 6543.63,226.63 U10.1@6543.63,236.94
NetD1_2: D1.2 L4.1 U9.2 | length 135
  Top Layer w25: U9.2@1543.27,155 D1.2@1675.57,155 ; D1.2@1678.66,158.09 D1.2@1680.57,160
NetD2_2: D2.2 L11.2 U10.6
NetJ1_2: J1.2 R32.1 | length 877.5
  Top Layer w10: J1.2@2955,283.77 2955,143 3028,70 R32.1@3661.54,70
NetJ1_3: J1.3 R31.1 | length 896.5
  Top Layer w10: J1.3@3055,283.77 3055,147 3099,103 R31.1@3796.54,103
NetJ1_4: J1.4 R30.1 | length 625
  Top Layer w10: J1.4@3155,283.77 3155,186 3205,136 R30.1@3661.54,136
NetJ1_5: J1.5 R29.1 | length 636.4
  Top Layer w10: J1.5@3255,283.77 3255,203 3289,169 R29.1@3796.54,169
NetJ1_6: J1.6 R28.1 | length 378.3
  Top Layer w10: J1.6@3355,283.77 3355,219 3372,202 R28.1@3661.54,202
NetJ1_7: J1.7 R26.1 | length 361.7
  Top Layer w10: J1.7@3455,283.77 3495.77,243 3788.53,243 R26.1@3796.54,235
NetJ2_1: J2.1 L1.1 | length 234.3
  Top Layer w20: L1.1@4335.54,473 4335.54,294.46 J2.1@4375,255
NetJ4_4: J4.4 J4.5 R46.2 | length 440
  Top Layer w30: J4.5@2316.85,517.49 2266.85,567.49 J4.4@2266.85,617.49 2266.85,637.85 2411.16,782.16 R46.2@2506,782.16
NetJ4_7: J4.7 J4.8 R48.2 | length 334.7
  Top Layer w30: J4.7@2416.85,517.49 2466.85,567.49 J4.8@2466.85,617.49 2586,736.64 R48.2@2586,782.16
NetL3_1: L3.1 U12.5 U12.6 U12.7 U12.8
NetQ1_1: Q1.1 R88.2 R123.2 | length 131.7
  Top Layer w20: Q1.1@7408.57,841.42 7408.57,713.7 R88.2@7411.39,710.88
NetQ1_3: Q1.3 R87.1 | length 123.6
  Top Layer w20: R87.1@7334.4,906.99 7353.08,906.99 7382,935.91 Q1.3@7445.97,935.91
NetR9_1: R9.1 X1.3 | length 119.6
  Top Layer w15: R9.1@5290.25,771.83 5385.14,771.83 X1.3@5402.64,789.32
NetR10_2: R10.2 U2.60 | length 132.7
  Top Layer w10: U2.60@4926.65,616.52 4926.65,524.77 4926.65,504.88 R10.2@4941.54,490
NetR15_2: R15.2 U2.28 | length 90.9
  Top Layer w10: U2.28@4789.13,1081.2 4789.13,1130.67 R15.2@4818.46,1160
NetR16_1: R16.1 U2.36 | length 570.6
  Top Layer w10: R16.1@4142,962.46 v1(4142,993) ; v1(4405,931) 4491,931 4497.58,937.58 U2.36@4625.55,937.58
  S3 w10: v1(4142,993) 4142,945 4156,931 v1(4405,931)
NetR17_1: R17.1 U2.35 | length 490.8
  Top Layer w10: R17.1@4192,962.46 v1(4192,993) ; v1@4433,957.26 U2.35@4625.55,957.26
  S3 w10: v1(4192,993) 4192,970 4201,961 v1(4433,961)
NetR18_1: R18.1 U2.34 | length 425.7
  Top Layer w10: R18.1@4242,962.46 v1(4242,993) v1@4242,998 ; v1(4405,993) 4457,993 4473.05,976.95 U2.34@4625.55,976.95
  S3 w10: v1(4242,993) v1(4405,993)
NetR19_1: R19.1 U2.33 | length 395
  Top Layer w10: R19.1@4292,962.46 4292,1006 4309,1023 4512,1023 4538.37,996.63 U2.33@4625.55,996.63
NetR49_1: R49.1 U5.45 | length 247.9
  Top Layer w10: R49.1@3688.85,1009 3688.85,940.15 3710,919 3792,919 3807,919 3813.64,912.36 U5.45@3813.64,869.63
NetR51_2: R51.2 T1.10 T1.15 | length 548.3
  Top Layer w20: T1.15@2713.68,513.46 v7(2762.85,513.46) ; T1.10@2713.68,763.46 v7(2762.85,763.46)
  Top Layer w30: R51.2@2747.92,957 2762.85,942.07 v6(2762.85,883.85)
  Bottom Layer w30: v7(2762.85,513.46) v7(2762.85,763.46) v6(2762.85,883.85) v6@2763,884
NetR52_2: R52.2 U5.10 | length 93.5
  Top Layer w10: R52.2@3596.75,612.46 3607.46,612.46 3618.57,623.57 U5.10@3685.69,623.57
NetR53_1: R53.1 U5.44 | length 232.3
  Top Layer w10: R53.1@3738.85,992.15 R53.1@3738.85,1009 3738.85,956.15 3753,942 3816,942 3833.32,924.68 U5.44@3833.32,869.63
NetR54_1: R54.1 U5.43 | length 206.7
  Top Layer w10: 3788.85,988.15 R54.1@3788.85,1009 3788.85,975.15 3799,965 3833,965 3853.01,944.99 U5.43@3853.01,869.63
NetR55_2: R55.2 U5.23 | length 151.9
  Top Layer w10: U5.23@3951.43,515.3 3951.43,474.88 4017.85,408.46 R55.2@4017.85,390.93
NetR56_2: R56.2 U5.38 | length 203.1
  Top Layer w10: U5.38@3951.43,869.63 3951.43,918.43 3967,934 4014,934 4038.85,958.85 R56.2@4038.85,1009
NetR57_2: R57.2 U5.39 | length 183.8
  Top Layer w10: U5.39@3931.75,869.63 3931.75,942.75 3946,957 3979,957 3988.85,966.85 R57.2@3988.85,1009 R57.2@3989.85,1008
NetR58_2: R58.2 U5.40 | length 150.5
  Top Layer w10: U5.40@3912.06,869.63 3912.06,958.06 3938.85,984.85 R58.2@3938.85,1009
NetR59_2: R59.2 U5.41 | length 162.7
  Top Layer w10: R59.2@3878.38,998.53 R59.2@3888.85,1009 ; U5.41@3892.38,869.63 R59.2@3892.38,1017.53
NetR60_2: R60.2 U5.42 | length 153.4
  Top Layer w10: R60.2@3838.85,1009 3838.85,1000.15 3872.69,966.31 U5.42@3872.69,869.63
NetR61_1: R61.1 U7.7 | length 86.4
  Top Layer w10: 7816.55,614.85 U7.7@7902.97,614.85
NetR62_1: R62.1 R68.2 U6.1 | length 201.5
  Top Layer w10: R62.1@7200.02,212.12 R68.2@7253.09,212.12 ; R68.2@7266.56,205.58 U6.1@7266.56,289.2 ; R68.2@7266.56,222.58 7266.56,262 7266.56,236.58
NetR67_2: R67.2 R68.1 U6.2 | length 135.9
  Top Layer w10: U6.2@7316.56,289.2 7316.56,212.12 R67.2@7375.39,212.12
NetR69_1: R69.1 U8.7 | length 86.4
  Top Layer w10: 8669.73,608.59 U8.7@8756.15,608.59
NetR70_1: R70.1 R76.2 U6.7 | length 190.5
  Top Layer w10: R70.1@7195.02,614.81 7248.09,614.81 7316.56,546.35 U6.7@7316.56,505.73
NetR75_2: R75.2 R76.1 U6.6 | length 171.8
  Top Layer w10: R76.1@7315.02,614.81 R75.2@7368.09,614.81 ; U6.6@7366.56,505.73 7368.09,507.27 R75.2@7368.09,623.81
NetR77_1: R77.1 U2.39 | length 841.4
  Top Layer w10: R77.1@4117.85,513.46 4117.85,543.85 4118,544 v1(4118,543) ; v1(4561,716) 4561,858 4581.52,878.52 U2.39@4625.55,878.52
  S3 w10: v1(4118,543) 4137,562 4543.75,562 4561,579.25 v1(4561,716)
NetR80_1: R80.1 R82.1 U9.3 | length 325.5
  Top Layer w15: R80.1@1523.46,370 R82.1@1523.46,320 1598,320 1622,296 1622,225 1605.09,208.09 U9.3@1533,208.09
NetR85_1: R85.1 R87.2 U12.4 | length 176.3
  Top Layer w20: U12.4@7169.85,945.46 7208.23,945.46 7236.69,973.92 R85.1@7261.7,973.92 R87.2@7334.4,973.92
NetR93_1: R93.1 U14.5 | length 240
  Top Layer w10: U14.5@1530,1368.27 1530,1273.08 1615,1188.08 R93.1@1615,1163.46
NetR94_1: R94.1 U15.5 | length 156.4
  Top Layer w10: R94.1@6403.46,895 6474,895 6484,905 U15.5@6484,976.73
NetR100_1: R100.1 U18.5 | length 103.5
  Top Layer w10: U18.5@4344.27,1050 4426.54,1050 R100.1@4441.54,1065
NetR101_1: R101.1 U19.5 | length 349.4
  Top Layer w15: R101.1@8407.46,1035 8675,1035 8720,1080 U19.5@8738.27,1080
NJTRST: U2.56
NRST_CPU: C2.2 R1.1 U2.7 | length 176.7
  Top Layer w10: U2.7@5090.23,819.47 5134.47,819.47 5150,835 C2.2@5210.39,835 ; C2.2@5210.39,828.76 R1.1@5210.39,878.83
OPD: R63.1 R64.2 SMA1.1
POWER_LED: R26.2 U2.52 | length 1262.1
  Top Layer w10: R26.2@3863.46,235 4289,235 4344,180 4590,180 ; 4592.06,180 4590,180 ; U2.52@4769.17,616.52 4769.17,536.17 4651,418 4651,241 4590,180
PTT_SW: R88.1 U2.4 | length 2664.2
  Top Layer w10: v1(5021,776) 5036.59,760.41 U2.4@5090.23,760.41 ; v1(6920,651.18) 7454.15,651.18 7478.31,675.35 R88.1@7478.31,710.88
  S3 w10: v1(5021,776) 5149,776 5215,710 5765,710 5782.51,692.49 6325,692.49 ; 6359,692.49 6325,692.49 ; v1(6920,651.18) 6878.69,692.49 6325,692.49
RFOUT_LED: R28.2 U2.53 | length 1438.9
  Top Layer w10: R28.2@3728.46,202 4288,202 4342,148 4597,148 4676,227 4676,406 4788.86,518.86 U2.53@4788.86,616.52
RPD: R71.1 R72.2 SMA2.1
RTC: R33.2 T1.2 | length 180.1
  Top Layer w20: T1.2@3068.02,513.46 v1(3114.46,513.46) ; v1(3152.23,590) R33.2@3181.54,590 R33.2@3181.76,590.23
  Bottom Layer w20: v1(3114.46,513.46) 3114.46,572.46 3132,590 v1(3152.23,590)
RX1_N: J4.6 T1.14 | length 601.8
  Top Layer w7.5: v1(2668.46,563.46) T1.14@2713.68,563.46 v1@2670.2,563.46
  S3 w7.5: J4.6@2366.85,617.49 2375,609.34 2375,468 2388,455 2480.37,455 2546.84,521.46 2654.46,521.46 2668.46,535.46 v1(2668.46,563.46)
RX1_P: J4.3 T1.16 | length 732.1
  Top Layer w7.5: v1(2669.54,463.46) T1.16@2713.68,463.46 v1@2670.2,463.46
  S3 w7.5: J4.3@2216.85,517.49 2265.36,566 2348,566 2359,555 2359,461.37 2381.37,439 2487,439 2553.46,505.46 2660.54,505.46 2669.54,496.46 v1(2669.54,463.46)
RX_N: R42.1 U5.5 | length 252.9
  Top Layer w7.5: R42.1@3437.31,729.13 3446.3,720.15 3648.35,720.15 3650.2,721.99 U5.5@3685.69,721.99
RX_P: R40.1 U5.6 | length 256
  Top Layer w7.5: R40.1@3437.31,687.46 3446.85,687.46 3463.54,704.15 3648.35,704.15 3650.2,702.31 U5.6@3685.69,702.31
SPDLED: U5.24
SPI2_MISO: R17.2 U5.34 | length 257.1
  Top Layer w10: U5.34@4040.02,761.36 4093.75,761.36 4171.69,839.31 4192,859.61 R17.2@4192,895.54 4192,867
SPI2_MOSI: R16.2 U5.35 | length 188.8
  Top Layer w10: U5.35@4040.02,781.05 4084.43,781.05 4142,838.61 R16.2@4142,895.54 R16.2@4142,889.54
SPI2_NSS: R19.2 R41.1 U5.32 | length 333.9
  Top Layer w10: U5.32@4040.02,721.99 4168.91,721.99 R41.1@4189.39,742.46 4200.85,753.93 4200.85,784.85 4269,853 4292,876
SPI2_SCK: R18.2 U5.33 | length 282.7
  Top Layer w10: U5.33@4040.02,741.68 4117.06,741.68 4242,866.61 R18.2@4242,895.54
START_SOFT: R4.1 U2.2 U10.4 | length 2054.5
  Top Layer w10: U2.2@5090.23,721.04 v1(5155,721.04) ; U10.4@6602.68,236.94 6602.68,201.32 v2(6618,186)
  S3 w10: v1(5155,721.04) 5191.04,685 5750,685 5770,665 6433,665 6469.35,628.65 6469.35,205.65 6489,186 v2(6618,186)
TCT: C34.2 R38.1 T1.7 | length 232.4
  Top Layer w15: T1.7@3068.02,763.46 3115.54,763.46 v1(3116,763) ; v1(3158,840) 3158.23,840.23 R38.1@3182.54,840.23 C34.2@3182.54,890.23
  Bottom Layer w15: v1(3116,763) 3116,824 3132,840 v1(3158,840)
TEMP_LED: R31.2 U2.61 | length 1597.9
  Top Layer w10: R31.2@3863.46,103 4136,103 v1(4263,103) ; 4946.34,565.66 4946.34,581 ; U2.61@4946.34,616.52 4946.34,581 ; v1(4961,535) 4946.34,549.66 4946.34,581
  S3 w10: v1(4263,103) 4263,325 4279,341 4631,341 4674,384 v1(4674,535)
  Bottom Layer w10: v1(4674,535) v1(4961,535)
TX1_N: J4.2 T1.9 | length 787.1
  Top Layer w7.5: v1(2668.46,813.46) T1.9@2713.68,813.46
  S3 w7.5: J4.2@2166.85,617.49 2157,607.64 2157,578 2164,571 2186,571 2209,594 2209,708.63 2271.84,771.46 2654.46,771.46 2668.46,785.46 v1(2668.46,813.46)
TX1_P: J4.1 T1.11 | length 799.3
  Top Layer w7.5: v1(2669.54,713.46) T1.11@2713.68,713.46
  S3 w7.5: J4.1@2116.85,517.49 2154.36,555 2192.63,555 2225,587.37 2225,702 2278.46,755.46 2660.54,755.46 2669.54,746.46 v1(2669.54,713.46)
TX_N: R44.1 U5.1 | length 256.8
  Top Layer w7.5: R44.1@3437.31,817.46 3446.85,817.46 3465.43,798.89 3648.35,798.89 3650.2,800.73 U5.1@3685.69,800.73
TX_P: R43.1 U5.2 | length 265.2
  Top Layer w7.5: R43.1@3421.28,782.89 3648.35,782.89 3650.2,781.05 U5.2@3685.69,781.05
V+: C53.2 C54.2 R62.2 U2.9 | length 2746
  Top Layer w10: v1(5021,846) 5033.84,858.84 U2.9@5090.23,858.84 ; v1(6959,572.18) 6959,225 6971.88,212.12 R62.2@7133.09,212.12
  S3 w10: v1(5021,846) 5126.72,846 5237.72,735 5780,735 5793.51,721.49 6320,721.49 ; 6359,721.49 6320,721.49 ; v1(6959,572.18) 6959,665 6902.51,721.49 6320,721.49
V-: C62.2 C63.2 R70.2 U2.10 | length 2409.5
  Top Layer w10: v1(4999.95,878) 5000.48,878.52 U2.10@5090.23,878.52 ; v1(6994,611.93) C62.2@7026.56,611.93 C63.2@7076.56,611.93 7125.21,611.93 R70.2@7128.09,614.81
  S3 w10: v1(4999.95,878) 5146.52,878 5264.52,760 5795,760 5804.51,750.49 6320,750.49 ; 6359,750.49 6320,750.49 ; v1(6994,611.93) 6994,681 6924.51,750.49 6320,750.49
VGS1: C22.1 L7.2
VGS2: C23.1 L8.2
VGS3: C43.1 L9.2
VGS4: C51.1 L10.2
VOLT_DEC: R84.1 U2.22 | length 176.2
  Top Layer w10: U2.22@4907.24,1081.2 4907.24,1186.24 4936,1215 R84.1@4966.54,1215
VSWR_LED: R29.2 U2.54 | length 1362.4
  Top Layer w10: R29.2@3863.46,169 4283,169 4334,118 4606,118 4700,212 4700,235 ; 4700,218.65 4700,235 ; U2.54@4808.54,616.52 4808.54,500.54 4700,392 4700,235
W5500_INTN: U2.37 U5.36 | length 737.3
  Top Layer w10: v1(4008,874) 4008,807 4014.27,800.73 U5.36@4040.02,800.73 ; v1(4433,899) 4503,899 4521.89,917.89 U2.37@4625.55,917.89
  S3 w10: v1(4008,874) 4033,899 v1(4433,899)
W5500_RSTN: R39.1 U2.38 U5.37 | length 727.9
  Top Layer w10: U5.37@3971.12,869.63 3971.12,895.12 3982,906 4090,906 4090,870 v1(4091,869) ; v1@4405,869 4519,869 4548.21,898.21 U2.38@4625.55,898.21
  S3 w10: v1(4091,869) v1(4400,869)
W5500_RX1_N: R35.2 R42.2 T1.3 | length 497
  Top Layer w7.5: T1.3@3068.02,563.46 3121.54,563.46 3144.77,540.23 3151,540.23 v1(3156,540.23) R35.2@3182.54,540.23 ; v1(3329.46,725.8) R42.2@3360.39,725.8
  S3 w7.5: v1(3156,540.23) 3174.23,522 3213,522 3236,545 3236,675.63 3270.37,710 3313.67,710 v1(3329.46,725.8)
W5500_RX1_P: R37.2 R40.2 T1.1 | length 498.8
  Top Layer w7.5: T1.1@3068.02,463.46 3121.46,463.46 3143.23,485.23 v1(3155,485.23) R37.2@3182.54,485.23 ; v1(3329.46,677.46) R40.2@3360.39,677.46
  S3 w7.5: v1(3155,485.23) 3175.77,506 3219.63,506 3252,538.37 3252,669 3277,694 3312.93,694 v1(3329.46,677.46)
W5500_TX1_N: R34.1 R44.2 T1.8 | length 361
  Top Layer w7.5: T1.8@3068.02,813.46 3117.54,813.46 3147,784 v1(3157,784) R34.1@3182.54,784 ; v1(3329.46,822.46) R44.2@3360.39,822.46
  S3 w7.5: v1(3157,784) 3175.23,765.77 3223.24,765.77 3263.46,806 3313.3,806 v1@3329.46,822.17
W5500_TX1_P: R36.1 R43.2 T1.6 | length 354.5
  Top Layer w7.5: T1.6@3068.02,713.46 3127.46,713.46 3149,735 R36.1@3182.54,735 ; v1(3329.46,774.13) R43.2@3360.39,774.13
  S3 w7.5: v1(3158,736) 3171.77,749.77 3229.86,749.77 3270.09,790 3313.3,790 v1@3329.17,774.13
pads on no net: J4.15 J4.16 T1.4 T1.5 T1.12 T1.13 U2.3 U2.6 U2.8 U2.11 U2.14 U2.17 U2.20 U2.25 U2.26 U2.27 U2.29 U2.30 U4.4 U5.7 U5.12 U5.13 U5.18 U5.46 U5.47 U11.4 U14.3 U14.6 U14.7 U15.3 U15.6 U15.7 U18.3 U18.6 U18.7 U19.3 U19.6 U19.7 X1.1

## Polygon pours and split planes (outlines as drawn)
GND on S3 "Top Layer-No Net" (solid, remove dead copper, pour order 7): 595,1645 75,1645 -40,1530 -40,40 100,-100 9065,-100 9290,125 9310,145 9310,1615 8700,1615 8695,1620 8695,1252.76 8649.79,1207.56 612.44,1207.56 590,1230 590,1640 595,1645
GND on Bottom Layer "Top Layer-No Net" (solid, remove dead copper, pour order 9): -65,395 -65,1555 15,1635 575,1635 590,1620 590,1335 335,1080 237.23,982.23 237.23,196.85 237.23,-27.77 205,-60 -25,-60 -70,-15 -65,-10 -65,610
GND on Bottom Layer "Top Layer-No Net" (solid, remove dead copper, pour order 11): 976.67,-198 976.67,1182 cw(c1028.67,1182) 1028.67,1234 7735.67,1234 ccw(c7735.67,1334) 7835.67,1334 7835.67,1674.8 7835.67,1681 cw(c7935.67,1681) 7935.67,1781 8579.67,1781 9224.67,1781 cw(c9224.67,1681) 9324.67,1681 9324.67,1343 9324.67,144 cw(c9224.67,144) 9224.67,44 9114.67,44 9114.67,31 cw(c9014.67,31) 9014.67,-69 976.67,-69
GND on Top Layer "Top Layer-No Net" (solid, remove dead copper, pour order 8): -65,395 -65,1555 15,1635 575,1635 590,1620 590,1335 335,1080 237.23,982.23 237.23,196.85 237.23,-27.77 205,-60 -25,-60 -70,-15 -65,-10 -65,610
GND on Top Layer "Top Layer-No Net" (solid, remove dead copper, pour order 12): 976,-223.75 976,1156.25 cw(c1028,1156.25) 1028,1208.25 7735,1208.25 ccw(c7735,1308.25) 7835,1308.25 7835,1649.06 7835,1655.25 cw(c7935,1655.25) 7935,1755.25 8579,1755.25 9224,1755.25 cw(c9224,1655.25) 9324,1655.25 9324,1317.25 9324,118.25 cw(c9224,118.25) 9224,18.25 9114,18.25 9114,5.25 cw(c9014,5.25) 9014,-94.75 976,-94.75
GND on S2 "Top Layer-No Net" (solid, remove dead copper, pour order 10): 595,1645 75,1645 -40,1530 -40,40 100,-100 9065,-100 9290,125 9310,145 9310,1615 8700,1615 8695,1620 8695,1252.76 8649.79,1207.56 612.44,1207.56 590,1230 590,1640 595,1645

## Keep-outs
Keep-Out Layer:
  lines w10: 0,159 0,1417 ; 0,1162 0,1417 ; 0.32,157.48 ccw(c157.8,157.48) 157.8,0 237.23,0 237.23,196.85 975,196.85 975,0 5149.17,0 5149.17,-59.06 5814.53,-59.06 5814.53,0 ; 157.48,1574.48 ccw(c157.48,1417) 0,1417 ; 157.48,1574.8 9055.12,1574.8 ; 5817,0 7825,0 7825,45.12 8097,45.12 8097,0 8669,0 8669,45.12 8922,45.12 8922,0 9055.12,0 ; 9055.12,0.52 ccw(c9055.12,158) 9212.6,158 9212.6,1417 ccw(c9055.12,1417) 9055.12,1574.48

## Other copper
Top Layer:
  rectangle net 28VIN: 6580,1148 6648,1336
  rectangle net 28VOUT4: 8688.76,1218 8784,1282.72
  rectangle net 28VIN: 8472,1167 8563,1303.59
  region net 28VIN: 8592,1276.76 8592,1541.76 8395,1541.76 8395,1276.76
  rectangle net 28VOUT4: 8688.76,1282.72 8938,1529.72
  region net 28VOUT3: 6439,1541.28 6174,1541.28 6174,1294.28 6439,1294.28
  rectangle net VGS2: 2994,1351 3144,1542
  rectangle net NetC68_2: 1493,844 2112.28,1024
  rectangle net NetD1_2: 1582,395 1880,571
  rectangle net 28VOUT1: 1295,1310 1391,1410
  rectangle net 28VIN: 430,236 1010,950
  rectangle net 28VIN: 1340,1100 1440,1190
  region net -5V: 6566,556 6566,408 6588,408 6588,556
  region net -5V: 6566,408 6578.5,395.5 6587.5,404.5 6575,417
  region net -5V: 6515,760 6515,541 6645,541 6645,760
  region net NetD2_2: 6618,476 6618,340 6750,340 6750,476
  region net +5V: 6624.1,252.4 6624.1,222 6652.6,222 6652.6,252.4
  region net GND: 6509,328 6509,264 6650,264 6650,328
  region net GND: 6650,316 6650,264 6880,264 6880,316
  rectangle net 28VIN: 750,1020 1340,1190
  region net 28VOUT2: 3871,1542 3606,1542 3606,1295 3871,1295
  rectangle net 28VIN: 4013,1286 4210,1536
  rectangle net VGS1: 390,1350 540,1541
  region net NetD1_2: 1729,185 1686,228 1613,155 1656,112
  rectangle net 28VOUT1: 1059,1310 1350,1542
  region net RPD: 8816.51,182.27 8816.51,268 8777.14,268 8777.14,182.27
  region net NetC58_1: 9046,242 9046,335.43 9006.63,335.43 9006.63,242
  region net 28VIN: 6820,1537 6580,1537 6580,1272 6820,1272
  rectangle net NetC75_1: 7129,768.23 7282,907.23
  rectangle net +5V: 5844,567 6130,620
  rectangle net NetD1_2: 1656,112 1773,483
  rectangle net 28VIN: 349,236 1240,430
  rectangle net 28VIN: 1543.81,48 1672,83
  region net 28VIN: 1606.73,73.73 1563.23,117.23 1545.5,99.5 1589,56
  region net RPD: 8886,272.51 8776.63,272.51 8776.63,233.14 8886,233.14
  region net NetC58_1: 9045,272.63 8940.58,272.63 8940.58,233.26 9045,233.26
  region net NetC58_2: 9008.19,567 9008.19,387.84 9047.56,387.84 9047.56,567
  region net NetC49_2: 8165.18,566.73 8165.18,387.58 8204.55,387.58 8204.55,566.73
  region net NetC49_1: 8209,272.36 8104.57,272.36 8104.57,232.99 8209,232.99
  region net OPD: 8050,272.24 7940.63,272.24 7940.63,232.87 8050,232.87
  region net NetC49_1: 8206,241.73 8206,335.17 8166.63,335.17 8166.63,241.73
  region net OPD: 7980.51,182 7980.51,267.73 7941.14,267.73 7941.14,182
  rectangle net 28VIN: 1149,29 1214,236
  rectangle net 28VIN: 1510,29 1575,119
  rectangle net 28VIN: 1575,29 1673.25,86.65
  rectangle net NetC68_2: 1955,844 2125,1081
  rectangle net GND: 1414.25,96 1465,264
  rectangle net GND: 1704.75,15.29 1890,86.65
  rectangle net GND: 3744,801 3758.58,854.63
  rectangle net GND: 7163.44,340.18 7227,369.9
  rectangle net GND: 5864,487 6014,512
  rectangle net 3.3VCC1: 4384.75,465 4475,494.65
  rectangle net 3.3VCC: 5058,499 5094,629
  rectangle net 3.3VCC: 5058,611 5162.8,648
  rectangle net 28VIN: 730,1020 1010,1542
  rectangle net VGS4: 8080.38,1351 8230.38,1542
  rectangle net +5V: 5993.75,211.98 6068.11,393.65
  rectangle net +5V: 6068.11,212 6130,373
  rectangle net +5V: 6062,349 6130,614
  rectangle net 3.3VCC1: 6165,397 6246,440
  rectangle net 3.3VCC1: 6175,304 6225,439.25
  rectangle net NetC68_2: 1792.35,922 2112,1093.25
  rectangle net VGS3: 5553.06,1351 5703.06,1542
  rectangle net 28VIN: 8402,1277 8461,1308
  rectangle net 28VIN: 4093,1142 4156,1286
  rectangle net 28VIN: 4017.2,1180.75 4153,1303
  rectangle net NetL3_1: 6905,781.18 6995,961.18
  rectangle net NetL3_1: 6815,780 6970,841
  rectangle net +5V_1: 6685,785 6785,841
  rectangle net NetC68_2: 5945,860 6076.49,952
  rectangle net +5V_1: 6685,710 6737,841
  region net 28VIN: 657.5,722.5 1042.5,1107.5 815,1335 430,950
  rectangle net 28VIN: 800,755 1010,1145
  rectangle net 28VIN: 349,345 745,590
  rectangle net GND: 6715.25,1203.82 7777,1209
  rectangle net GND: 8194,1100 8436.65,1242
  rectangle net GND: 8173.35,1197 8216,1314.25
  rectangle net GND: 1301.35,95 1485,136.35
  rectangle net GND: 1370.75,935 1452.65,1061.65
  rectangle net GND: 3951.24,1050 4060,1167.63
  rectangle net GND: 5650,1195 5685,1315
  rectangle net GND: 3100,1185 3140,1320
  rectangle net +5V: 6655,40 6690,215
  region net +5V: 6669.49,194.49 6690,215 6652.6,252.4 6632.09,231.9
  pour cut-out: 1095,485 1095,960 1065,990 1030,955 1030,510 1065,475 1075,485
  region net NetC59_2: 8904.67,641.14 8904.67,627.14 8979.67,627.14 9006.67,614.14 9051.09,614.14 9051.09,653.51 9006.67,653.51 8978.67,641.14
  region net NetC50_2: 8064.48,647.4 8064.48,633.4 8139.48,633.4 8166.48,620.4 8210.9,620.4 8210.9,659.77 8166.48,659.77 8138.48,647.4
  pour cut-out: 4529.75,840.75 4376.67,840.75 4370.85,834.93 4370.85,544.93 4370.92,544.86 4535.78,544.86 4540.85,549.93 4540.85,829.65
  pour cut-out: 2771.85,604.42 2771.85,887.43 2768.85,890.43 3013.85,890.43 3013.85,386.49 2768.85,386.49 2768.85,890.43
  pour cut-out: 5355.58,895 5542,895 5542,1032 5672,1032 5672,1005 5678.42,1005 5678.42,760 5355.58,760
  pour cut-out: 2802.99,1015.53 3069,1015.53 3069,896.47 2789,896.47 2789,1015.47 2802.99,1015.47
  pour cut-out: 2606,906 2606,1016 2561,1016 2561,906
  pour cut-out: 630,1605 630,1335 600,1305 280,1305 275,1310 275,1590 295,1610 305,1600 625,1600
  pour cut-out: 8333,1209 8363,1239 8363,1585 8324,1624 7742,1624 7739,1621 7739,1214 7744,1209
  pour cut-out: 8994,1601 8994,1237 8982,1225 8789,1225 8780,1234 8780,1591 8790,1601
  pour cut-out: 1045,545 1280,545 1306.3,518.7 1306.3,481.3 1290,465 1060,465 1045,480
  pour cut-out: 2125,803.65 2193.65,803.65 2230,840 2230,1110 2215,1125 2165,1125 2115,1075 2125,1065
  pour cut-out: 8736.8,182.27 8736.8,28.2 8745,20 8850,20 8856.86,26.86 8856.86,192.79 9053.95,192.79 9086.35,225.19 9086.35,663.24 9072.97,676.61 8983.61,676.61 8962,655 8967.84,649.16 8967.84,315.23 8965.61,313 8776.92,313 8736.28,272.36 8736.83,271.81 8736.83,182
  pour cut-out: 7900.28,232.87 7900.28,50.84 7906,45.12 8011.36,45.12 8020.85,54.61 8020.85,192.53 8208.88,192.53 8249.34,232.99 8249.34,662.55 8230.28,681.61 8136.61,681.61 8113,658 8124.84,646.16 8124.84,313.31 8125.15,313 7941.04,313 7900.28,272.24 7900.79,271.73 7900.79,228.98
  pour cut-out: 6121.81,964.06 6079.06,964.06 6075,960 6075,855 6084.06,845.94 6142.98,845.94 6148.15,851.12 6148.15,937.71
S2:
  rectangle net 28VIN: 730,1275 8591,1542
  pour cut-out: 2771.85,604.42 2771.85,887.43 2768.85,890.43 3013.85,890.43 3013.85,386.49 2768.85,386.49 2768.85,890.43
  pour cut-out: 335,160 335,960 350,975 1060,975 1105,930 1105,220 1055,170 345,170
S3:
  rectangle net 28VIN: 730,1276 8586,1542
  pour cut-out: 2771.85,604.42 2771.85,887.43 2768.85,890.43 3013.85,890.43 3013.85,386.49 2768.85,386.49 2768.85,890.43
  pour cut-out: 335,160 335,960 350,975 1060,975 1105,930 1105,220 1055,170 345,170
Bottom Layer:
  rectangle net 28VIN: 730,980 1010,1400
  rectangle net 28VIN: 430,236 1010,950
  rectangle net 28VIN: 730,1276 8592,1542
  rectangle net 28VIN: 460,525 1010,980
  region net 28VIN: 947.5,1167.5 797.5,1317.5 430,950 580,800
  pour cut-out: 1095,1240 1095,185 1065,155 950,155 970,175 970,1240
  pour cut-out: 2771.85,604.42 2771.85,887.43 2768.85,890.43 3013.85,890.43 3013.85,386.49 2768.85,386.49 2768.85,890.43

## Silkscreen, mask and mechanical layers (free items; w line width, h text height)
Top Overlay:
  lines w10: 7559,0 7559,959.73 9212.6,959.62 ; 7721,869.8 8408.91,869.8 8409.07,0 ; 7721.01,870.98 7721.17,0.01 ; 8570.81,0 8570.81,870 ; 8570.81,872.27 9212.6,872.27
  text "Vgs" at 285,1515 h59.06
  text "Vds" at 1385,1515 h59.06
  text "Vgs" at 2875,1515 h59.06
  text "Vds" at 3500,1515 h59.06
  text "Vgs" at 5445,1515 h59.06
  text "Vds" at 6055,1515 h59.06
  text "Vgs" at 7955,1515 h59.06
  text "Vds" at 8940,1515 h59.06
  text "WS7.820.291.V04" at 5700,1125 h78.74
  text "OPD" at 7800,420 h60
  text "RPD" at 8680,420 h60
  text "1" at 5225,370 h39.37
  text "2" at 5315,370 h39.37
  text "3" at 5415,370 h39.37
  text "4" at 5510,370 h39.37
  text "5" at 5615,370 h39.37
  text "6" at 5720,370 h39.37
  text "POWER IN" at 310,230 h50 r90
  text "GND" at 4595,65 h31.5 r90
  text "3.3V" at 4390,45 h31.5 r90
  text "Temp" at 4492.5,45 h31.5 r90